# Altium PCB USB_Term.PcbDoc
Units mil, origin at the board's own origin, x right, y up, seen from the top; angles counter-clockwise.
Board outline 24000 x 20000 mil, 2 copper layers (Top Layer, Bottom Layer); 9 components, 12 nets, 42 pads, 0 vias.
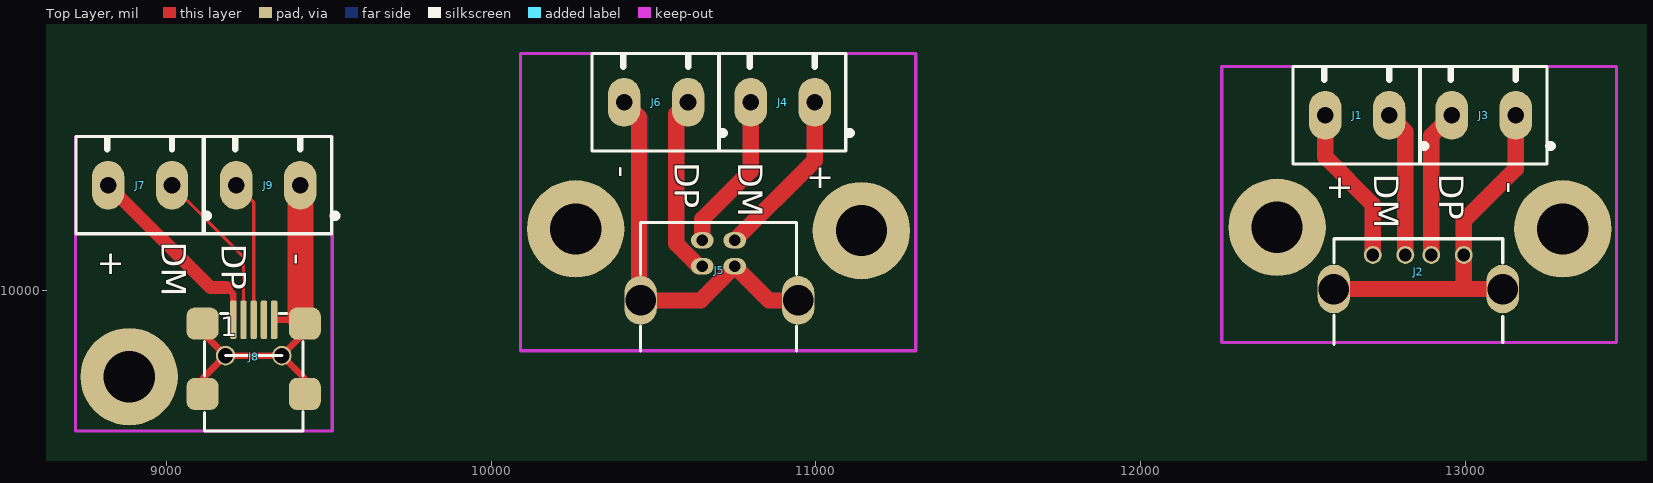
[diagram p0: Top Layer view]
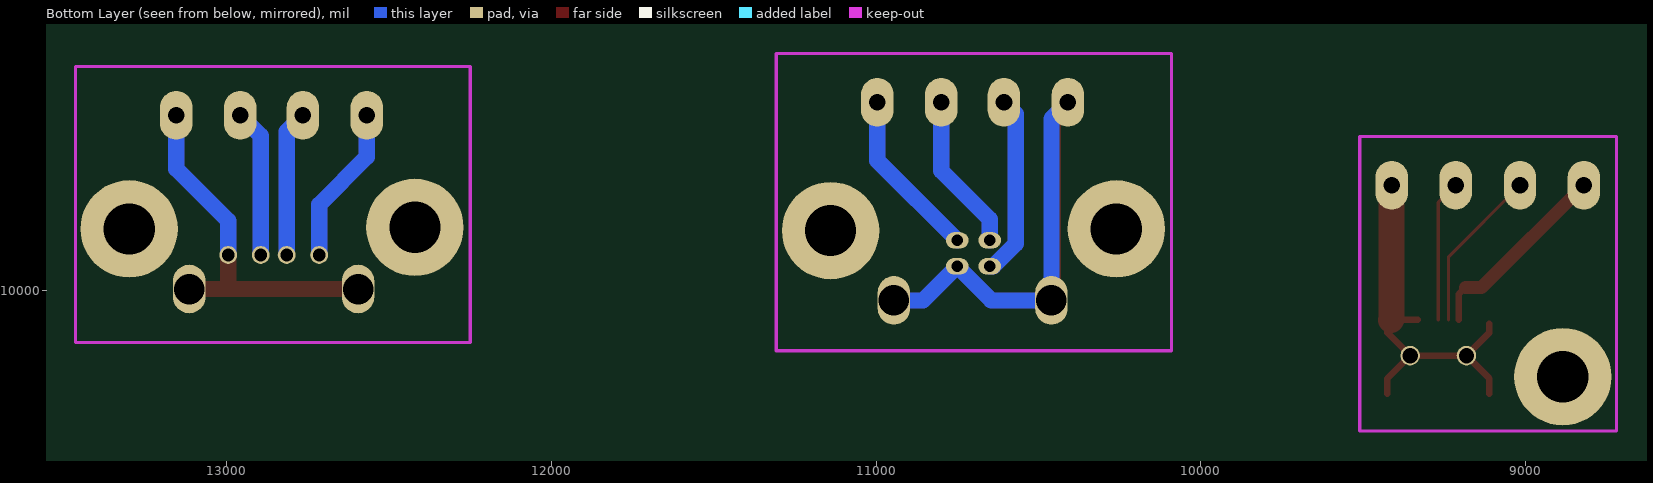
[diagram p1: Bottom Layer view, seen from below]

## Layer stack, top to bottom
Top Layer: signal copper 1.4
Dielectric: dielectric 12.6, FR-4, Dk 4.8
Bottom Layer: signal copper 1.4

## Board outline
0,0 24000,0 24000,20000 0,20000

## Design rules (kind name [scope] priority, off if disabled: settings)
Clearance Clearance_poly [InPoly] p1: gap=13
Clearance [All] p2: gap=7
ComponentClearance [All] p1 off: gap=10 collisioncheckmode=3 verticalgap=10 showdistances=FALSE
FabricationTestPointUsage TestPointUsage [All] p1: valid=0 allowmultiple=FALSE
FabricationTestpoint Testpoint [All] p1: side=3 testpointundercomponent=TRUE minsize=40 maxsize=100 preferedsize=60 minholesize=0 maxholesize=40 preferedholesize=32 testpointgrid=1 allowsidetop=TRUE allowsidebottom=TRUE usegrid=TRUE gridtolerance=0.01
HoleSize [All] p1: absolutevalues=TRUE maxlimit=150 minlimit=24 maxpercent=80.000 minpercent=20.000
MinimumAnnularRing [All] p1: minimumring=8
PlaneClearance [All] p1: clearance=12
PolygonConnect PolygonConnect_via [IsVia] p1: connectstyle=Direct reliefconductorwidth=10 reliefentries=4 polygonreliefangle="90 Angle" airgapwidth=10
PolygonConnect [All] p2: connectstyle=Relief reliefconductorwidth=10 reliefentries=4 polygonreliefangle="90 Angle" airgapwidth=10
RoutingVias [All] p1: holewidth=24 width=40 viastyle="Through Hole" minholewidth=24 minwidth=35 maxholewidth=28 maxwidth=50
SilkscreenOverComponentPads [All vs (IsText AND OnLayer('Top Overlay'))] p1: minsilkscreentomaskgap=10
SolderMaskExpansion [All] p1: expansion=4
Width [All] p1: maxlimit=150 minlimit=10 preferedwidth=10
22 further rules are at their usual default settings.

## Components (designator, comment, footprint, x,y, rotation, side; value= is the part's Value field where it differs from the comment)
J1 "CON2" TERMS5mm2 12765,10540 r180 top
J2 "USB-A" USB_A 12815,10110 r0 top
J3 "CON2" TERMS5mm2 13155,10540 r180 top
J4 "CON2" TERMS5mm2 10996,10580 r180 top
J5 "USB-B" USB_B 10750,10155 r0 top
J6 "CON2" TERMS5mm2 10606,10580 r180 top
J7 "CON2" TERMS5mm2 9016.85,10325 r180 top
J8 "USB_MINI" USB_MINI_B 9181.77,9800 r0 top
J9 "CON2" TERMS5mm2 9411.85,10325 r180 top

## Footprints (in the part's own frame and the unit in brackets; to place one, negate y for a bottom-side part, rotate by r counter-clockwise, add the part's x,y. Pads: shape width x height; smd on the part's side, far side on the other; paste and mask are expansions set on the pad)
TERMS5mm2 [mil]
  oval 100x150 hole 51: 1(0,0) 2(196.85,0)
  silkscreen extent -108,-150 296,150
USB_A [mil]
  round 78.74 smd: 0(-220,-105) 0(300,-105)
  round 55 hole 39: 1(-100,0) 2(0,0) 3(80,0) 4(180,0)
  silkscreen extent -220,50 300,50
USB_B [mil]
  oval 100x150 hole 94: 0(-290,-185) 0(195,-185)
  oval 70x50 hole 35: 1(0,0) 2(-100,0) 3(-100,-80) 4(0,-80)
  silkscreen extent -290,-105 190,55
USB_MINI_B [mm]
  rrect50% 2.5x2.5 smd: 0(-1.8,-3) 0(-1.8,2.5) 0(6.2,-3) 0(6.2,2.5)
  round 1.524 hole 1.2: 0(0,0) 0(4.4,0)
  rrect50% 0.5x3 smd: 1(0.6,2.8) 2(1.4,2.8) 3(2.2,2.8) 4(3,2.8) 5(3.8,2.8)
  silkscreen extent -1.65,-5.9 6.05,3.3

## Free pads (board coordinates)
  round 300 hole 158: 0(8885,9735) 0(10260,10190) 0(11140,10185) 0(12420,10195) 0(13300,10190)
  oval 100x150 hole 94: 0(12595,10005) 0(13115,10005)

## Nets (pads, with @x,y where several pads share a name; then routed paths per layer and width w, separated by ;. In a path a pad name is that pad's centre, name@x,y a point inside that pad or via, vN(x,y) a via of type N, cw(c..) or ccw(c..) an arc to the next point about the centre after c; other vN are vias at no path point)
+1: J1.2 J2.1 | length 981.7
  Top Layer w50: J1.2 12568.15,10411.85 12715,10265 J2.1
  Bottom Layer w50: J1.2 12568.15,10411.85 12715,10265 J2.1
+2: J4.1 J5.1 | length 1053.8
  Top Layer w50: J5.1 10996,10401 J4.1
  Bottom Layer w50: J5.1 10996,10401 J4.1
+3: J7.2 J8.1 | length 603.7
  Top Layer w20: 9185,10010 9205.39,9989.61 J8.1
  Top Layer w40: J7.2 9135,10010 9185,10010
DM1: J1.1 J2.2 | length 901.4
  Top Layer w50: J1.1 12815,10490 J2.2
  Bottom Layer w50: J1.1 12815,10490 J2.2
DM2: J4.2 J5.2 | length 973.6
  Top Layer w50: J5.2 10650,10220 10799.15,10369.15 J4.2
  Bottom Layer w50: J5.2 10650,10220 10799.15,10369.15 J4.2
DM3: J7.1 J8.2 | length 505.9
  Top Layer w10: J7.1 9236.89,10104.96 J8.2
DP1: J2.3 J3.2 | length 912.3
  Top Layer w50: J2.3 12895,10476.85 J3.2
  Bottom Layer w50: J2.3 12895,10476.85 J3.2
DP2: J5.3 J6.1 | length 1118.5
  Top Layer w50: J6.1 10570,10544 10570,10144.39 10639.39,10075 J5.3
  Bottom Layer w50: J6.1 10570,10544 10570,10144.39 10639.39,10075 J5.3
DP3: J8.3 J9.2 | length 436.9
  Top Layer w10: J9.2 9268.39,10271.61 J8.3
G1: J2.4 J3.1 pad.0@12595,10005 pad.0@13115,10005 | length 1619.6
  Top Layer w50: pad.0@12595,10005 13000,10005 ; pad.0@13115,10005 13000,10005 ; J3.1 13155,10375 12995,10215 J2.4 12995,10010 13000,10005
  Bottom Layer w50: J2.4 12995,10215 13155,10375 J3.1
G2: J5.0 J5.4 J6.2 | length 2406.1
  Top Layer w50: J6.2 10455,10534.15 10455,9975 10460,9970 10645,9970 J5.4 10855,9970 J5.0@10945,9970
  Bottom Layer w50: J6.2 10460,10529.15 10460,9970 10645,9970 J5.4 10855,9970 J5.0@10945,9970
G3: J8.0 J8.5 J9.1 | length 1238.8
  Top Layer w20: J8.0@9110.91,9681.89 9110.91,9729.13 J8.0@9181.77,9800 ; J8.0@9110.91,9898.43 9110.91,9870.87 J8.0@9181.77,9800 ; J8.5 9414.06,9910.24 9425.87,9898.43 9425.87,9870.87 J8.0@9355,9800 ; J8.0@9425.87,9681.89 9425.87,9729.13 J8.0@9355,9800 ; J8.0@9181.77,9800 J8.0@9355,9800
  Top Layer w80: J9.1 9411.85,9912.44 J8.0@9414.06,9910.24
pads on no net: J2.0 J8.4

## Keep-outs
Keep-Out Layer:
  lines w10: 10940,9815 11307,9815 11307,10730 10090,10730 10090,9815 10950,9815 ; 8720,9567.72 9510,9567.72 9510,10475 8720,10475 8720,9567.72 ; 12250,9840 12250,10130 12250,10690 13251,10690 13465,10690 13465,10235 13465,9840 12250,9840

## Silkscreen, mask and mechanical layers (free items; w line width, h text height)
Top Overlay:
  lines w10: 10460,9815 10460,9890 ; 10940,9815 10940,9890 ; 12595,9835 12595,9925 ; 12595,10085 12595,10160 ; 13115,9840 13115,9920 ; 13115,10085 13115,10160
  text "DP" at 10565,10395 h75 r270
  text "DM" at 10760,10395 h75 r270
  text "-" at 10370,10385 h75 r270
  text "DM" at 12720,10360 h75 r270
  text "DP" at 12920,10360 h75 r270
  text "-" at 13105,10335 h75 r270
  text "+" at 10970,10315 h75
  text "+" at 12570,10285 h75
  text "DM" at 8985,10150 h75 r270
  text "DP" at 9170,10145 h75 r270
  text "-" at 9370,10115 h75 r270
  text "+" at 8785,10050 h75
Mechanical 1:
  lines w10: 8720,9567.72 8720,10475 9510,10475 9510,9567.72 8720,9567.72 ; 10090,9815 10090,10730 11307,10730 11307,9815 10090,9815 ; 12250,9840 12250,10690 13465,10690 13465,9840 12250,9840

## Text inside footprints (layer, text, board x,y; h text height)
J8: Top Overlay "1" at 9166.02,9859.06 h60